# EAGLE board 2-Layer (EAGLE 5.11)
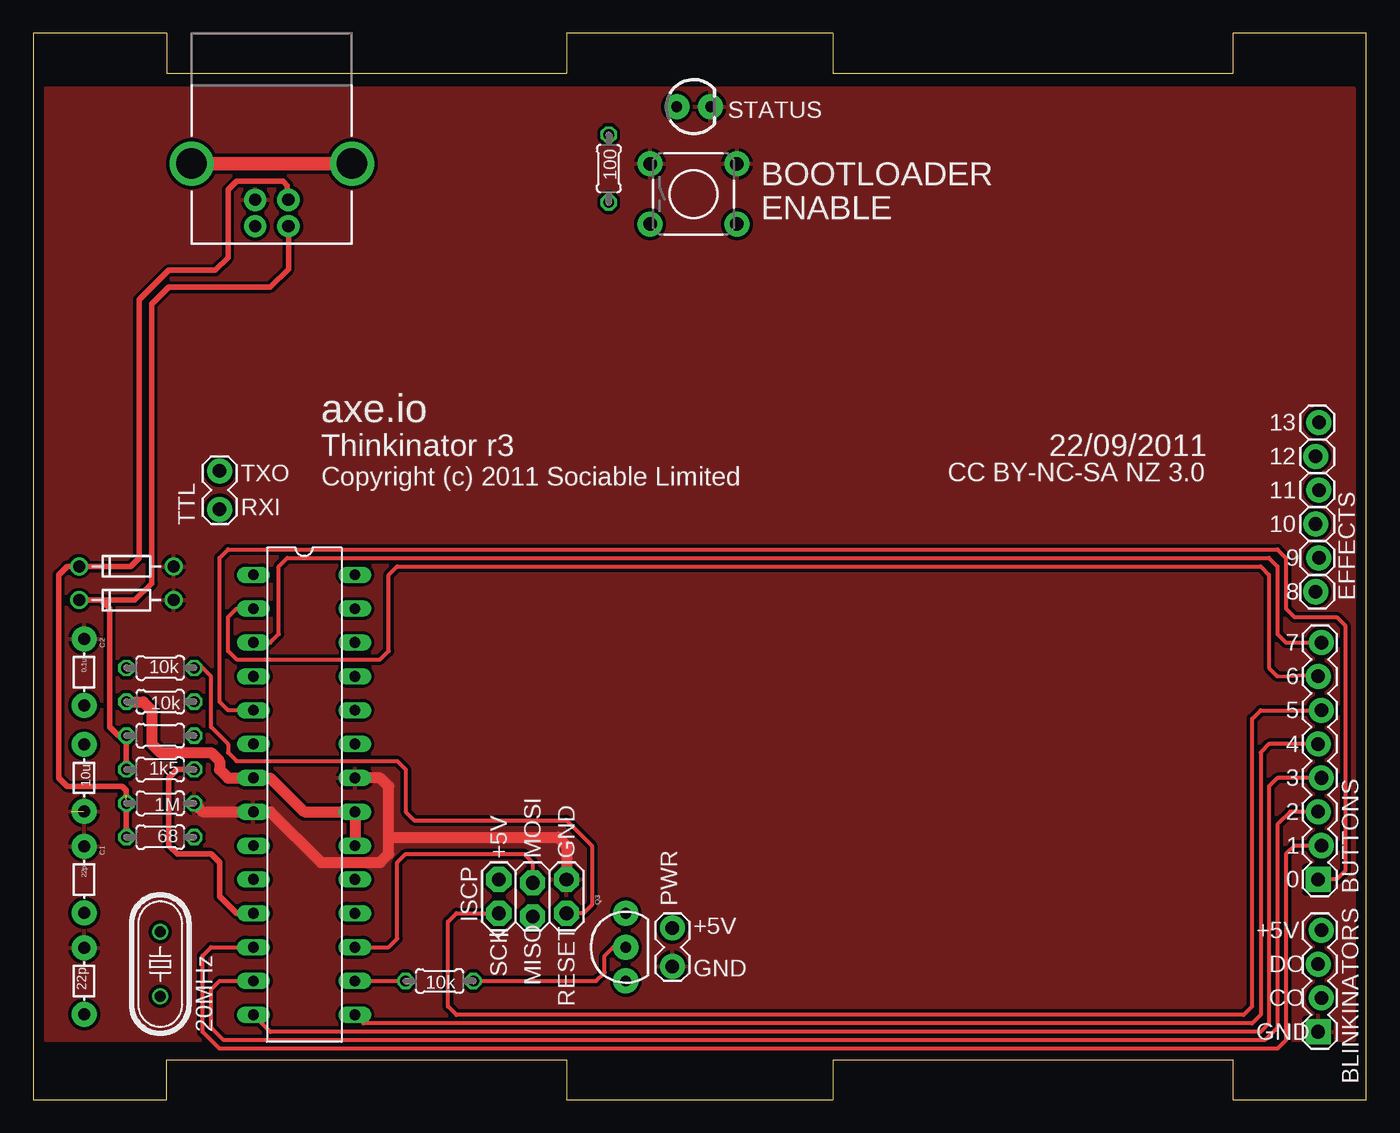
[diagram p0: board, top side]
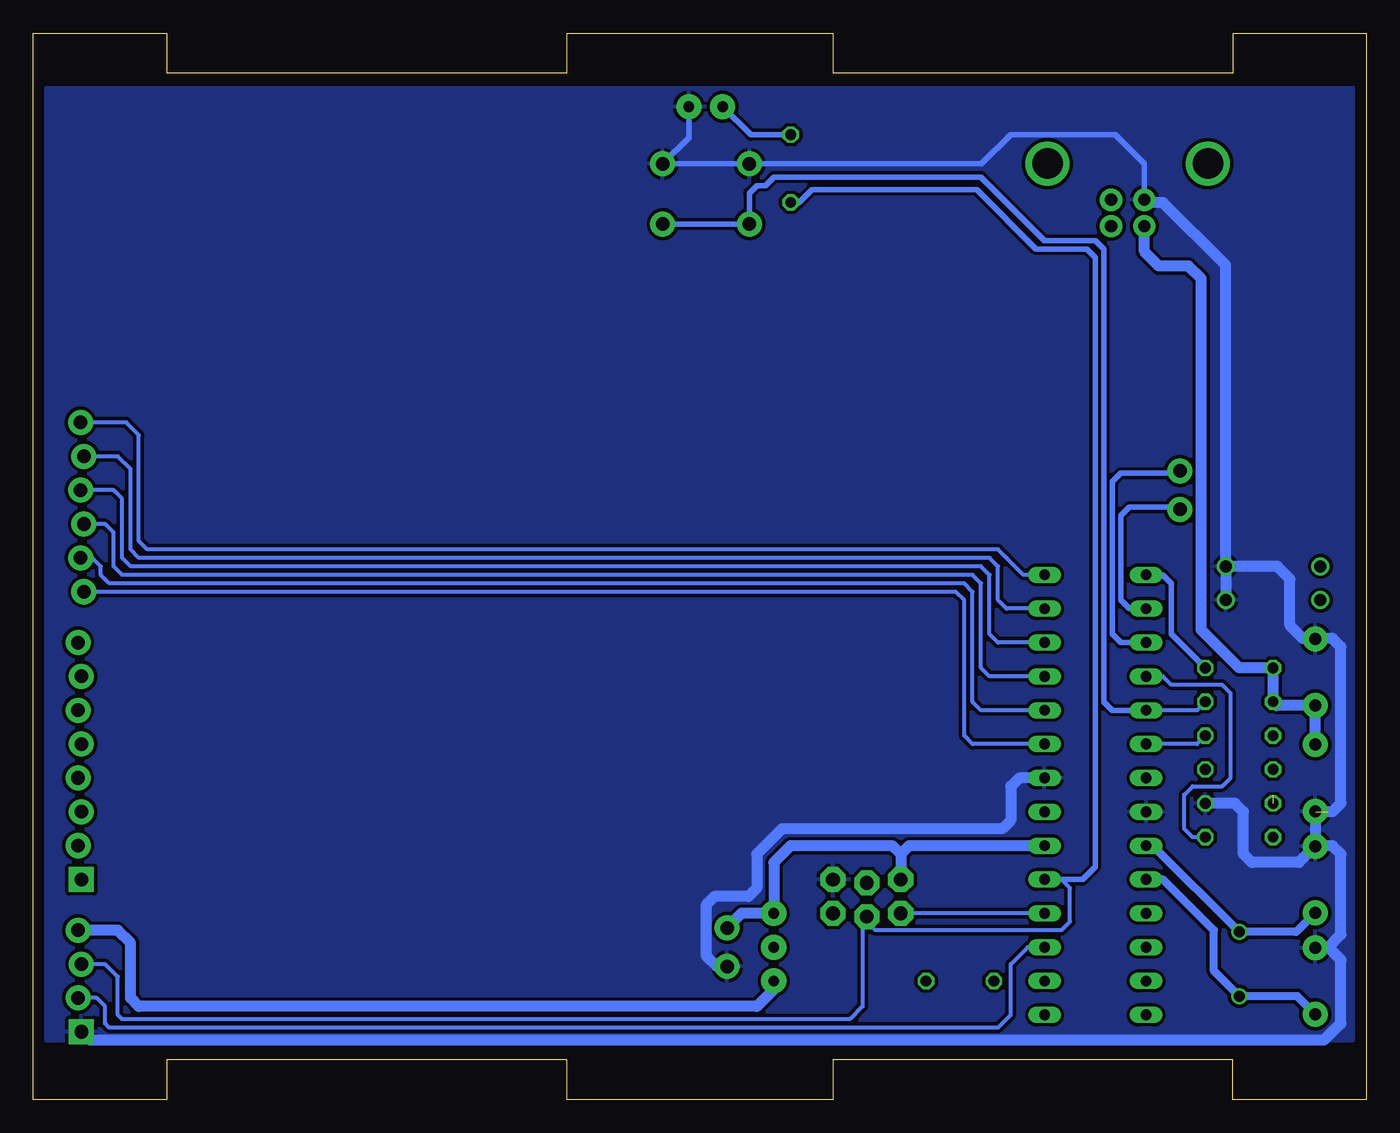
[diagram p1: board, bottom side, seen from below]

Size 100 x 80 mm. Coordinates in mm from the lower left corner, seen from the top.
Outline: 0,0 10,0 10,3 40,3 40,0 60,0 60,3 90,3 90,0 100,0 100,80 90,80 90,77 60,77 60,80 40,80 40,77 10,77 10,80 0,80 0,0
Copper layers (1*16): Top 0.0356mm / dielectric 1.5011mm / Bottom 0.0356mm
Design rules "LaenPCBOrder": minimum track width 6mil, minimum drill 13mil, track to track 6mil, track to pad 6mil, pad to pad 6mil, via to via 6mil, smd to smd 6mil, copper to edge 15mil, drill to drill 6mil, minimum pad ring 7mil, minimum via ring 7mil, stop-mask expansion 4mil, vias tented up to drill 0mil, thermal gap 10mil

## Footprints (pad centres in the part's own frame; a part is rotated, then mirrored left to right if it is on the bottom)
1X04_LOCK = drill 1.016 pad 1.88 square: 1 0,0.127 | drill 1.016 pad 1.88 round: 2 2.54,-0.127; 3 5.08,0.127; 4 7.62,-0.127
TACTILE-PTH = drill 1.016 pad 1.88 round: 1 -3.251,2.261; 2 3.251,2.261; 3 -3.251,-2.261; 4 3.251,-2.261
1X08_LOCK = drill 1.016 pad 1.88 square: 1 0,0.127 | drill 1.016 pad 1.88 round: 2 2.54,-0.127; 3 5.08,0.127; 4 7.62,-0.127; 5 10.16,0.127; 6 12.7,-0.127; 7 15.24,0.127; 8 17.78,-0.127
AXIAL-5MM = drill 0.9 pad 1.88 round: P$1 -2.5,0; P$2 2.5,0
1X06_LOCK = drill 1.016 pad 1.88 round: 1 0,0; 2 2.54,-0.254; 3 5.08,0; 4 7.62,-0.254; 5 10.16,0; 6 12.7,-0.254
DIL28-3 = drill 0.813 long: 1 -16.51,-3.81; 2 -13.97,-3.81; 3 -11.43,-3.81; 4 -8.89,-3.81; 5 -6.35,-3.81; 6 -3.81,-3.81; 7 -1.27,-3.81; 8 1.27,-3.81; 9 3.81,-3.81; 10 6.35,-3.81; 11 8.89,-3.81; 12 11.43,-3.81; 13 13.97,-3.81; 14 16.51,-3.81; 15 16.51,3.81; 16 13.97,3.81; 17 11.43,3.81; 18 8.89,3.81; 19 6.35,3.81; 20 3.81,3.81; 21 1.27,3.81; 22 -1.27,3.81; 23 -3.81,3.81; 24 -6.35,3.81; 25 -8.89,3.81; 26 -11.43,3.81; 27 -13.97,3.81; 28 -16.51,3.81
2X3_LOCK = drill 1.016 pad 1.88 octagon: 1 0,0; 2 0,2.54; 3 2.54,-0.254; 4 2.54,2.286; 5 5.08,0; 6 5.08,2.54
1X02_LOCK = drill 1.016 pad 1.88 round: 1 -0.178,0; 2 2.718,0
HC49/S = drill 0.813 round: 1 -2.413,0; 2 2.413,0
TO-92-AMMO = drill 0.813 pad 1.88 round: 1 -2.54,0; 2 0,0; 3 2.54,0
0204/5 = drill 0.813 octagon: 1 -2.54,0; 2 2.54,0
LED3MM = drill 0.813 pad 1.88 round: A -1.27,0; K 1.27,0
USB-B-PTH = drill 0.914 pad 1.676 round: D+ 0,1.25; D- 1.981,1.25; GND 0,-1.25; VBUS 1.981,-1.25 | drill 2.286 round: S1 -2.718,-6.02; S2 -2.718,6.02
DIODE-ZENER = drill 0.9 round: P$1 -3.556,0; P$2 3.556,0

## Placement (x,y rotation side)
BLINKINATORS  [1X04_LOCK]  96.52,5.08 90 top
BOOTLOADER  [TACTILE-PTH]  49.53,67.94 0 top
BUTTONS  [1X08_LOCK]  96.52,16.51 90 top
C1  22p  [AXIAL-5MM]  3.81,16.51 270 top
C2  0.1u  [AXIAL-5MM]  3.81,32.07 270 top
C3  22p  [AXIAL-5MM]  3.81,8.89 270 top
C4  10u  [AXIAL-5MM]  3.81,24.13 270 top
EFFECTS  [1X06_LOCK]  96.2,38.1 90 top
IC1  ATMEGA328P  [DIL28-3]  20.32,22.86 270 top
ISCP  [2X3_LOCK]  34.92,13.97 0 top
PWR  [1X02_LOCK]  47.94,10.16 90 top
Q1  20MHz  [HC49/S]  9.53,10.16 90 top
Q3  [TO-92-AMMO]  44.45,11.43 90 top
R1  10k  [0204/5]  9.53,32.38 0 top
R2  1M  [0204/5]  9.53,22.23 180 top
R3  10k  [0204/5]  30.48,8.89 180 top
R4  68  [0204/5]  9.53,19.68 0 top
R5  68  [0204/5]  9.53,27.3 0 top
R6  10k  [0204/5]  9.53,29.84 180 top
R7  100  [0204/5]  43.18,69.85 270 top
R8  1k5  [0204/5]  9.53,24.77 0 top
STATUS  [LED3MM]  49.55,74.5 0 top
TTL  [1X02_LOCK]  13.97,44.45 90 top
U$1  USB+SHIELD  [USB-B-PTH]  17.89,67.51 270 top
U$2  3.6V 0.5W  [DIODE-ZENER]  6.99,40.01 0 top
U$3  3.6V 0.5W  [DIODE-ZENER]  6.99,37.47 0 top

## Library data of the parts
BLINKINATORS BOOTLOADER BUTTONS C1-C4 EFFECTS ISCP PWR Q3 STATUS TTL U$1-U$3 = SparkFun
IC1 = avr-6
Q1 = crystal; OC_FARNELL: 1667008; OC_NEWARK: unknown
R1-R8 = rcl

## Nets
+5V: C2.P$2 C4.P$1 IC1.7 IC1.20 IC1.21 ISCP.2 PWR.2 Q3.3 R1.1 R6.2 U$1.VBUS
A0: EFFECTS.1 IC1.23
A1: EFFECTS.2 IC1.24
A2: EFFECTS.3 IC1.25
A3: EFFECTS.4 IC1.26
A4: EFFECTS.5 IC1.27
A5: EFFECTS.6 IC1.28
D0: BUTTONS.7 IC1.2 TTL.1
D1: BUTTONS.8 IC1.3 TTL.2
D2: IC1.4 R4.2
D3: BOOTLOADER.3 BOOTLOADER.4 BUTTONS.1 IC1.5 R6.1
D4: IC1.6 R5.2
D5: IC1.11 R8.2
D6: BUTTONS.2 IC1.12
D7: BUTTONS.3 IC1.13
D8: BUTTONS.4 IC1.14
D9: BUTTONS.5 IC1.15
D10: IC1.16 R3.2
D11: BLINKINATORS.2 IC1.17 ISCP.4
D12: BUTTONS.6 IC1.18 ISCP.1
D13: BLINKINATORS.3 IC1.19 ISCP.3 R7.2
GND: BLINKINATORS.1 BOOTLOADER.1 BOOTLOADER.2 C1.P$1 C2.P$1 C3.P$1 C4.P$2 IC1.8 IC1.22 ISCP.6 PWR.1 R2.1 STATUS.K U$1.GND U$2.P$2 U$3.P$2
N$1: C1.P$2 IC1.9 Q1.2
N$2: C3.P$2 IC1.10 Q1.1
N$3: R2.2 R4.1 U$1.D+ U$2.P$1
N$4: R5.1 R8.1 U$1.D- U$3.P$1
N$5: R7.1 STATUS.A
N$6: U$1.S1 U$1.S2
N$7: BLINKINATORS.4 Q3.1
N$8: Q3.2 R3.1
RESET: IC1.1 ISCP.5 R1.2

## Tracks (layer width: path | path; a pad name or v marks a point on that pad's centre or on a via)
+5V
  Top 0.813: IC1.20 IC1.21 20.32,21.59 17.78,24.13 IC1.7 14.61,24.13 13.97,24.77 13.97,25.4 13.34,26.04 9.53,26.04 8.89,26.67 8.89,29.21 8.26,29.84 R6.2
  Bottom 0.813: 34.92,18.41 ISCP.2 | 34.92,18.41 34.29,19.05 IC1.20 | 34.92,18.41 35.56,19.05 43.18,19.05 44.45,17.78 Q3.3 46.85,13.97 PWR.2 | U$1.VBUS 16.64,63.63 15.56,62.55 13.34,62.55 12.38,61.59 12.38,35.24 9.53,32.38 R1.1 R6.2 6.71,29.57 C2.P$2 C4.P$1
A0
  Bottom 0.305: EFFECTS.1 30.8,38.1 30.16,37.47 30.16,27.3 29.53,26.67 IC1.23
A1
  Bottom 0.305: EFFECTS.2 95.57,40.64 94.93,40.01 94.93,39.37 94.3,38.73 30.16,38.73 29.53,38.1 29.53,29.84 28.89,29.21 IC1.24
A2
  Bottom 0.305: EFFECTS.3 94.61,43.18 93.98,42.55 93.98,40.01 93.34,39.37 29.53,39.37 28.89,38.73 28.89,32.38 28.26,31.75 IC1.25
A3
  Bottom 0.305: EFFECTS.4 93.98,45.72 93.34,45.09 93.34,40.64 92.71,40.01 28.89,40.01 28.26,39.37 28.26,34.92 27.62,34.29 IC1.26
A4
  Bottom 0.305: EFFECTS.5 93.66,48.26 92.71,47.31 92.71,41.27 92.08,40.64 28.26,40.64 27.62,40.01 27.62,37.47 26.99,36.83 IC1.27
A5
  Bottom 0.305: EFFECTS.6 93.03,50.8 92.08,49.85 92.08,41.91 91.44,41.27 27.62,41.27 26.99,40.64 25.72,39.37 25.4,39.37 IC1.28
D0
  Top 0.305: BUTTONS.7 96.39,31.88 93.34,31.75 92.71,32.38 92.71,39.37 92.08,40.01 27.3,40.01 26.67,39.37 26.67,33.66 26.04,33.02 15.24,33.02 14.61,33.66 14.61,36.2 15.24,36.83 IC1.2
  Bottom 0.406: IC1.2 17.78,36.83 18.41,37.47 18.41,43.81 17.78,44.45 14.15,44.45 TTL.1
D1
  Top 0.305: BUTTONS.8 95.89,34.29 93.98,34.29 93.34,34.92 93.34,40.01 92.71,40.64 19.05,40.64 18.41,40.01 18.41,34.92 17.78,34.29 IC1.3
  Bottom 0.406: IC1.3 18.41,34.29 19.05,34.92 19.05,46.35 18.41,46.99 14.15,46.99 TTL.2
D2
  Bottom 0.305: IC1.4 15.24,31.75 14.61,31.11 10.79,31.11 10.16,30.48 10.16,24.13 10.79,23.5 13.02,23.5 13.65,22.86 13.65,20.32 13.02,19.68 R4.2
D3
  Top 0.305: BUTTONS.1 97.79,16.51 98.42,17.14 98.42,35.56 97.79,36.2 94.61,36.2 93.98,36.83 93.98,40.64 93.34,41.27 14.61,41.27 13.97,40.64 13.97,29.84 14.61,29.21 IC1.5
  Bottom 0.305: IC1.5 12.7,29.21 R6.1
  Bottom 0.406: BOOTLOADER.4 BOOTLOADER.3 46.28,68.02 45.72,68.58 45.09,68.58 44.45,69.22 28.89,69.22 24.13,64.45 20.32,64.45 19.68,63.82 19.68,29.84 19.05,29.21 IC1.5
D4
  Bottom 0.305: R5.2 12.7,26.67 IC1.6
D5
  Top 0.406: IC1.11 15.24,13.97 13.97,15.24 13.97,17.78 13.34,18.41 10.79,18.41 10.16,19.05 10.16,24.13 10.79,24.77 R8.2
D6
  Top 0.305: BUTTONS.2 94.61,19.05 93.98,18.41 93.98,4.45 93.34,3.81 13.97,3.81 12.7,5.08 12.7,10.79 13.34,11.43 IC1.12
D7
  Top 0.305: BUTTONS.3 94.3,21.59 93.34,20.64 93.34,5.4 92.39,4.45 14.29,4.45 13.34,5.4 13.34,8.26 13.97,8.89 IC1.13
D8
  Top 0.305: BUTTONS.4 93.34,24.13 92.71,23.5 92.71,5.71 92.08,5.08 17.78,5.08 IC1.14
D9
  Top 0.305: 95.89,26.67 92.71,26.67 92.08,26.04 92.08,6.35 91.44,5.71 24.77,5.71 IC1.15
  Top 0.406: BUTTONS.5 95.89,26.67
D10
  Top 0.305: IC1.16 R3.2
D11
  Top 0.305: ISCP.4 37.47,17.78 36.83,18.41 27.94,18.41 27.3,17.78 27.3,12.06 26.67,11.43 IC1.17
  Bottom 0.305: BLINKINATORS.2 95.25,7.62 94.61,6.99 94.61,5.71 94.3,5.4 27.62,5.4 26.67,6.35 26.67,10.16 25.4,11.43 IC1.17
D12
  Top 0.305: BUTTONS.6 92.08,29.21 91.44,28.57 91.44,6.99 90.81,6.35 31.75,6.35 31.11,6.99 31.11,13.34 31.75,13.97 ISCP.1
  Bottom 0.305: IC1.18 ISCP.1
D13
  Bottom 0.305: IC1.19 22.86,16.51 22.23,15.88 22.23,13.34 22.86,12.7 36.83,12.7 37.47,13.34 ISCP.3 37.78,13.4 37.78,6.99 38.73,6.03 93.34,6.03 93.66,6.35 93.66,9.21 94.61,10.16 BLINKINATORS.3
  Bottom 0.406: R7.2 42.55,67.31 41.59,68.26 29.21,68.26 24.77,63.82 20.95,63.82 20.32,63.18 20.32,17.46 21.27,16.51 IC1.19
GND  (1 unrouted)
  Top 0.813: R2.1 12.7,21.59 IC1.8 17.78,21.59 21.59,17.78 26.04,17.78 26.67,18.41 26.67,19.68 | ISCP.6 40.01,19.05 39.37,19.68 26.67,19.68 | IC1.22 26.04,24.13 26.67,23.5 26.67,19.68
  Bottom 0.406: U$1.GND 16.64,70.23 18.8,72.39 26.67,72.39 28.85,70.21 BOOTLOADER.1 BOOTLOADER.2 50.82,72.17 STATUS.K
  Bottom 0.813: BLINKINATORS.1 95.76,4.45 3.17,4.45 1.91,5.71 1.91,10.48 2.86,11.43 3.77,11.43 C3.P$1 2.9,11.39 1.91,12.38 1.91,18.41 2.54,19.05 3.77,19.05 | 3.77,19.05 C1.P$1 5.04,17.78 8.57,17.78 9.21,18.41 9.21,21.59 9.84,22.23 R2.1 | 3.77,19.05 3.77,21.59 C4.P$2 | U$2.P$2 10.54,62.61 15.24,67.31 16.44,67.31 U$1.GND | 2.86,21.59 2.54,21.59 1.91,22.23 1.91,33.97 2.54,34.61 3.77,34.61 C2.P$1 4.72,34.57 5.71,35.56 5.71,39.05 6.67,40.01 U$2.P$2 | U$2.P$2 U$3.P$2 | PWR.1 48.72,9.98 49.53,10.79 49.53,14.61 48.9,15.24 46.35,15.24 45.72,15.88 45.72,18.41 43.81,20.32 27.3,20.32 26.67,20.95 26.67,23.5 26.04,24.13 IC1.22
  pour Bottom (isolate 0.254): 0.95,75.88 99.06,75.88 99.06,4.45 0.95,4.45
  pour Top (isolate 0.254): 0.95,75.88 99.06,75.88 99.06,4.45 0.95,4.45
N$1
  Bottom 0.61: IC1.9 16,19.05 Q1.2 5.25,12.57 C1.P$2
N$2
  Bottom 0.61: IC1.10 15.24,16.51 11.43,12.7 11.43,9.65 Q1.1 5.17,7.75 C3.P$2
N$3  (1 unrouted)
  Top 0.406: R4.1 R2.2 | U$1.D+ 19.05,67.6 19.05,68.58 18.73,68.9 15.24,68.9 14.61,68.26 14.61,63.18 13.65,62.23 10.16,62.23 7.94,60.01 7.94,40.64 7.3,40.01 U$2.P$1 2.54,40.01 1.91,39.37 1.91,24.13 2.54,23.5 6.67,23.5 6.99,23.18 6.99,22.86
N$4
  Top 0.406: R8.1 R5.1 6.35,27.3 5.71,27.94 5.71,36.83 5.08,37.47 | U$1.D- 19.14,62.32 17.78,60.96 10.16,60.96 8.89,59.69 8.89,38.73 7.62,37.47 5.08,37.47 | 5.08,37.47 U$3.P$1
N$5
  Bottom 0.406: R7.1 46.17,72.39 STATUS.A
N$6
  Top 1.016: U$1.S1 U$1.S2
N$7
  Bottom 0.813: BLINKINATORS.4 93.66,12.7 92.71,11.75 92.71,7.62 92.08,6.99 45.72,6.99 44.45,8.26 Q3.1
N$8
  Top 0.305: R3.1 42.23,8.89 42.86,9.53 42.86,10.79 43.5,11.43 Q3.2
RESET
  Top 0.305: ISCP.5 41.27,13.97 41.91,14.61 41.91,19.05 40.01,20.95 28.57,20.95 27.94,21.59 27.94,24.77 27.3,25.4 15.24,25.4 14.61,26.04 14.61,26.67 13.34,27.94 13.34,31.75 12.7,32.38 R1.2
  Bottom 0.406: R1.2 14.61,34.92 14.61,38.73 15.24,39.37 IC1.1

## Text on the board
tPlace: axe.io | 13 | Thinkinator r3 | 22/09/2011 | 12 | TXO | Copyright (c) 2011 Sociable Limited | CC BY-NC-SA NZ 3.0 | 11 | RXI | 10 | 9 | 8 | 7 | 6 | 5 | 4 | 3 | 2 | +5V | MOSI | GND | 1 | 0 | +5V | DO | SCK | MISO | RESET | CO | GND
tNames: BOOTLOADER | ENABLE | +5V | GND